# EAGLE board Board-v1.2 (EAGLE 9.7.0)
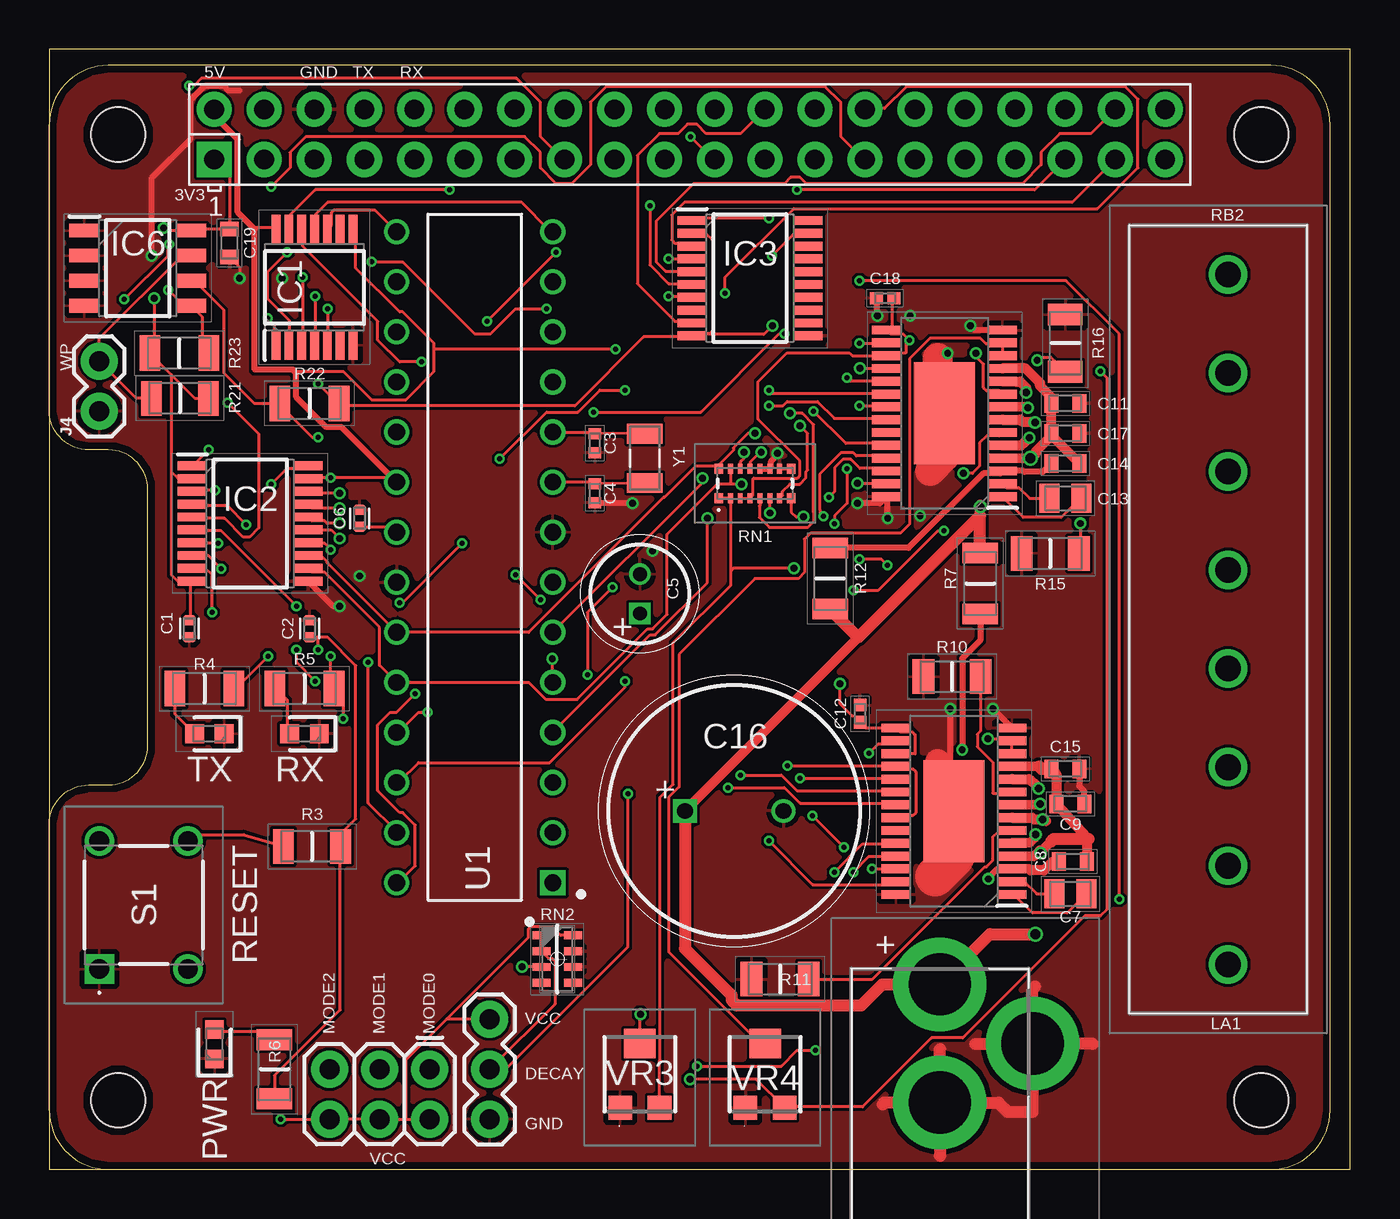
[diagram p0: board, top side]
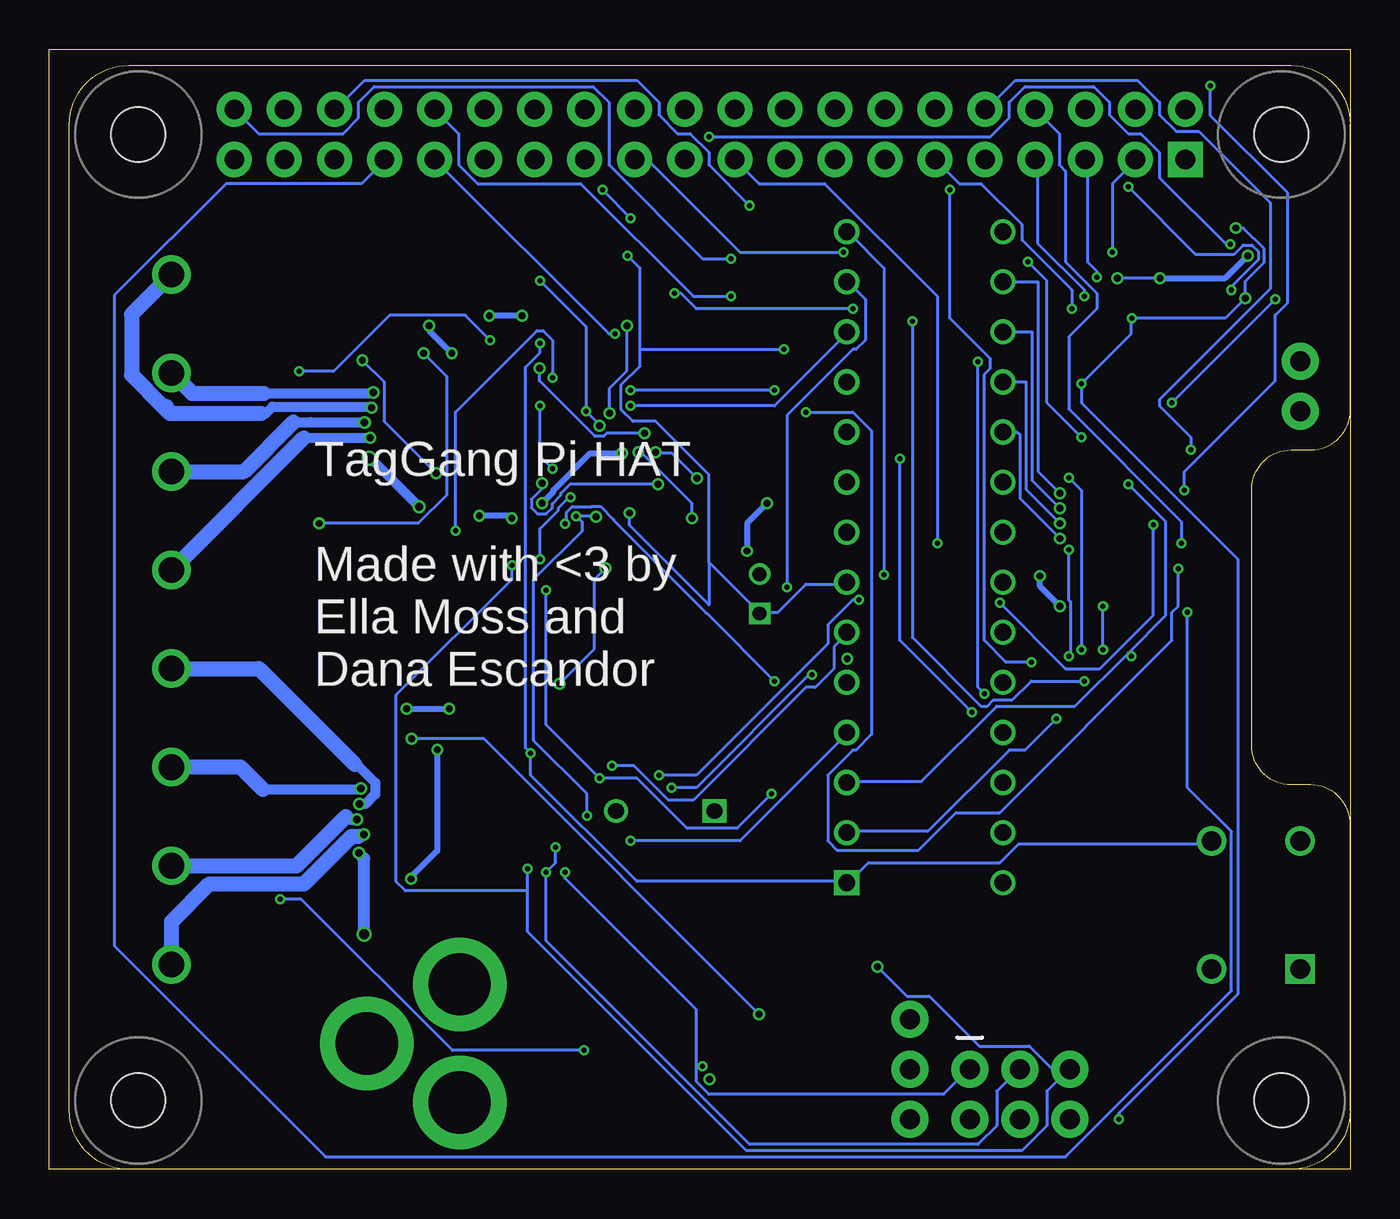
[diagram p1: board, bottom side, seen from below]

Size 66.02 x 56.82 mm. Coordinates in mm from the lower left corner, seen from the top.
Outline: 0,0 66.02,0 66.02,56.82 0,56.82 0,0
Copper layers (1*16): Top / Bottom
Stack-up Default Layer Stack: Top User Defined 0.035559375mm / Dielectric-1 User Defined 1.6mm / Bottom User Defined 0.035559375mm
Design rules "oshpark-2layer": minimum track width 6mil, minimum drill 10mil, track to track 6mil, track to pad 6mil, pad to pad 6mil, via to via 6mil, smd to smd 6mil, copper to edge 15mil, drill to drill 6mil, minimum pad ring 5mil, minimum via ring 5mil, stop-mask expansion 2.5mil, vias tented up to drill 0mil, thermal gap 10mil

## Footprints (pad centres in the part's own frame; a part is rotated, then mirrored left to right if it is on the bottom)
CAPC1005X55N = smd 0.54 x 0.6: 1 -0.43,0; 2 0.43,0
CAPC1005X55N' = smd 0.56 x 0.62: 1 -0.48,0; 2 0.48,0
CAPPRD200W52D500H1250 = drill 0.7 pad 1.1 square: 1 0,0 | drill 0.7 pad 1.1: 2 2,0
CAPC2012X94N = smd 1.02 x 1.47: 1 -0.81,0; 2 0.81,0
CAPC1608X90N = smd 0.73 x 0.94: 1 -0.71,0; 2 0.71,0
CAPC1005X55N'' = smd 0.65 x 0.62: 1 -0.44,0; 2 0.44,0
CAPPRD500W60D1275H2650 = drill 0.8 pad 1.2 square: 1 0,0 | drill 0.8 pad 1.2: 2 5,0
SOP65P640X120-14N = smd 1.475 x 0.45: 1 -2.938,1.95; 2 -2.938,1.3; 3 -2.938,0.65; 4 -2.938,0; 5 -2.938,-0.65; 6 -2.938,-1.3; 7 -2.938,-1.95; 8 2.938,-1.95; 9 2.938,-1.3; 10 2.938,-0.65; 11 2.938,0; 12 2.938,0.65; 13 2.938,1.3; 14 2.938,1.95
SOP65P640X120-20N = smd 1.475 x 0.45: 1 -2.938,2.925; 2 -2.938,2.275; 3 -2.938,1.625; 4 -2.938,0.975; 5 -2.938,0.325; 6 -2.938,-0.325; 7 -2.938,-0.975; 8 -2.938,-1.625; 9 -2.938,-2.275; 10 -2.938,-2.925; 11 2.938,-2.925; 12 2.938,-2.275; 13 2.938,-1.625; 14 2.938,-0.975; 15 2.938,-0.325; 16 2.938,0.325; 17 2.938,0.975; 18 2.938,1.625; 19 2.938,2.275; 20 2.938,2.925
SOP65P640X120-29N = smd 1.475 x 0.45: 1 -2.938,4.225; 2 -2.938,3.575; 3 -2.938,2.925; 4 -2.938,2.275; 5 -2.938,1.625; 6 -2.938,0.975; 7 -2.938,0.325; 8 -2.938,-0.325; 9 -2.938,-0.975; 10 -2.938,-1.625; 11 -2.938,-2.275; 12 -2.938,-2.925; 13 -2.938,-3.575; 14 -2.938,-4.225; 15 2.938,-4.225; 16 2.938,-3.575; 17 2.938,-2.925; 18 2.938,-2.275; 19 2.938,-1.625; 20 2.938,-0.975; 21 2.938,-0.325; 22 2.938,0.325; 23 2.938,0.975; 24 2.938,1.625; 25 2.938,2.275; 26 2.938,2.925; 27 2.938,3.575; 28 2.938,4.225 | smd 3.1 x 5.18: 29 0,0
SOIC127P600X175-8N = smd 1.525 x 0.7: 1 -2.712,1.905; 2 -2.712,0.635; 3 -2.712,-0.635; 4 -2.712,-1.905; 5 2.712,-1.905; 6 2.712,-0.635; 7 2.712,0.635; 8 2.712,1.905
1X03 = drill 1.016 pad 1.88: 1 0,0; 2 2.54,0; 3 5.08,0
PRT00119 = drill 3.162 pad 4.743: 1 -5.664,-1.286; 2 0.336,-1.286; 3 -2.664,3.414
TB00150008BE = drill 1.3 pad 1.95: 1 0,0; 2 5,0; 3 10,0; 4 15,0; 5 20,0; 6 25,0; 7 30,0; 8 35,0
1X02 = drill 1.016 pad 1.88: 1 0,0; 2 2.54,0
2X3 = drill 1.016 pad 1.88: 1 0,0; 2 0,2.54; 3 2.54,0; 4 2.54,2.54; 5 5.08,0; 6 5.08,2.54
LEDC1608X80N = smd 0.95 x 0.95: 1 -0.75,0; 2 0.75,0
RESC3116X65N = smd 1.05 x 1.75: 1 -1.45,0; 2 1.45,0
RESC3216X60N = smd 1.05 x 1.8: 1 -1.5,0; 2 1.5,0
RESC3216X70N = smd 1.05 x 1.8: 1 -1.55,0; 2 1.55,0
RESC3216X70N' = smd 1.1 x 1.75: 1 -1.45,0; 2 1.45,0
EXBU2H = smd 0.425 x 0.5: 1 -1.837,-0.75; 8 1.837,-0.75; 9 1.837,0.75; 16 -1.837,0.75 | smd 0.25 x 0.5: 2 -1.25,-0.75; 3 -0.75,-0.75; 4 -0.25,-0.75; 5 0.25,-0.75; 6 0.75,-0.75; 7 1.25,-0.75; 10 1.25,0.75; 11 0.75,0.75; 12 0.25,0.75; 13 -0.25,0.75; 14 -0.75,0.75; 15 -1.25,0.75
CAPCAV80P155X320X60-8L = smd 0.9 x 0.4: 1 -0.8,1.2; 2 0.8,1.2; 3 -0.8,0.4; 4 0.8,0.4; 5 -0.8,-0.4; 6 0.8,-0.4; 7 -0.8,-1.2; 8 0.8,-1.2
PTS645SH952LFS = drill 1 pad 1.5 square: 1 0,0 | drill 1 pad 1.5: 2 6.5,0; 3 0,-4.5; 4 6.5,-4.5
DIP794W46P254L2967H457Q28B = drill 0.85 square: 1 -3.96,16.51 | drill 0.85: 2 -3.96,13.97; 3 -3.96,11.43; 4 -3.96,8.89; 5 -3.96,6.35; 6 -3.96,3.81; 7 -3.96,1.27; 8 -3.96,-1.27; 9 -3.96,-3.81; 10 -3.96,-6.35; 11 -3.96,-8.89; 12 -3.96,-11.43; 13 -3.96,-13.97; 14 -3.96,-16.51; 15 3.96,-16.51; 16 3.96,-13.97; 17 3.96,-11.43; 18 3.96,-8.89; 19 3.96,-6.35; 20 3.96,-3.81; 21 3.96,-1.27; 22 3.96,1.27; 23 3.96,3.81; 24 3.96,6.35; 25 3.96,8.89; 26 3.96,11.43; 27 3.96,13.97; 28 3.96,16.51
TC33X2503E = smd 1.2 x 1.2: 1 -1,-1.7; 3 1,-1.7 | smd 1.6 x 1.5: 2 0,1.55
RASPI_BOARD_B+HAT_DF = drill 1 pad 1.778 square: 1 8.37,51.23 | drill 1 pad 1.778: 2 8.37,53.77; 3 10.91,51.23; 4 10.91,53.77; 5 13.45,51.23; 6 13.45,53.77; 7 15.99,51.23; 8 15.99,53.77; 9 18.53,51.23; 10 18.53,53.77; 11 21.07,51.23; 12 21.07,53.77; 13 23.61,51.23; 14 23.61,53.77; 15 26.15,51.23; 16 26.15,53.77; 17 28.69,51.23; 18 28.69,53.77; 19 31.23,51.23; 20 31.23,53.77; 21 33.77,51.23; 22 33.77,53.77; 23 36.31,51.23; 24 36.31,53.77; 25 38.85,51.23; 26 38.85,53.77; 27 41.39,51.23; 28 41.39,53.77; 29 43.93,51.23; 30 43.93,53.77; 31 46.47,51.23; 32 46.47,53.77; 33 49.01,51.23; 34 49.01,53.77; 35 51.55,51.23; 36 51.55,53.77; 37 54.09,51.23; 38 54.09,53.77; 39 56.63,51.23; 40 56.63,53.77 | hole 2.75: 3.5,3.5; 3.5,52.5; 61.5,3.5; 61.5,52.5
XTAL_CC7V-T1A-32.768KHZ-12.5PF-20PPM-TA-QC = smd 1 x 1.8: 1 -1.25,0; 2 1.25,0

## Placement (x,y rotation side)
C1  CC0402MRX5R6BB104  [CAPC1005X55N]  7.11,27.43 90 top
C2  CC0402MRX5R6BB104  [CAPC1005X55N]  13.21,27.43 270 top
C3  0402N150F500CT  [CAPC1005X55N']  27.69,36.83 90 top
C4  0402N150F500CT  [CAPC1005X55N']  27.69,34.29 90 top
C5  860020472001  [CAPPRD200W52D500H1250]  29.97,28.19 90 top
C6  CC0402MRX5R6BB104  [CAPC1005X55N]  15.75,33.02 90 top
C7  08055C103KAT4A  [CAPC2012X94N]  51.82,13.97 180 top
C8  CL10B104KA8NNNC  [CAPC1608X90N]  51.94,15.62 0 top
C9  CL10B104KA8NNNC  [CAPC1608X90N]  51.82,18.54 180 top
C11  CL10B104KA8NNNC  [CAPC1608X90N]  51.56,38.86 180 top
C12  C0402C474K9PACTU  [CAPC1005X55N'']  41.15,23.11 270 top
C13  08055C103KAT4A  [CAPC2012X94N]  51.56,34.04 180 top
C14  CL10B104KA8NNNC  [CAPC1608X90N]  51.56,35.81 0 top
C15  CL10B104KA8NNNC  [CAPC1608X90N]  51.56,20.32 180 top
C16  EGXF101ELL201MK25S  [CAPPRD500W60D1275H2650]  32.26,18.18 0 top
C17  CL10B104KA8NNNC  [CAPC1608X90N]  51.56,37.34 180 top
C18  C0402C474K9PACTU  [CAPC1005X55N'']  42.42,44.2 0 top
C19  CL10B104KA8NNNC  [CAPC1608X90N]  9.14,46.99 90 top
IC1  TXS0104EPWR  [SOP65P640X120-14N]  13.46,44.74 90 top
IC2  TXS0108EPWRG4  [SOP65P640X120-20N]  10.2,32.77 0 top
IC3  TXS0108EPWRG4  [SOP65P640X120-20N]  35.56,45.21 0 top
IC4  DRV8825PWPR  [SOP65P640X120-29N]  45.91,18.17 180 top
IC5  DRV8825PWPR  [SOP65P640X120-29N]  45.43,38.35 180 top
IC6  CAT24C32WI-GT3  [SOIC127P600X175-8N]  4.49,45.72 0 top
J1  [1X03]  22.35,2.54 90 top
J2  PRT-00119  [PRT00119]  46.48,3.72 270 top
J3  TB001-500-08BE  [TB00150008BE]  59.82,10.4 90 top
J4  [1X02]  2.54,38.46 90 top
J5  FEMALE 2x3  [2X3]  19.3,5.08 180 top
PWR  150060GS75000  [LEDC1608X80N]  8.38,6.35 90 top
R3  CRGCQ1206F1K0  [RESC3116X65N]  13.34,16.38 0 top
R4  CRCW1206360RJNEA  [RESC3216X60N]  7.87,24.38 0 top
R5  CRCW1206360RJNEA  [RESC3216X60N]  12.95,24.38 0 top
R6  CRCW1206360RJNEA  [RESC3216X60N]  11.43,5.08 90 top
R7  RK73B2BTTD105J  [RESC3216X70N]  47.24,29.72 90 top
R10  73L4R20J  [RESC3216X70N']  45.81,25 0 top
R11  73L4R20J  [RESC3216X70N']  37.08,9.65 0 top
R12  RK73B2BTTD105J  [RESC3216X70N]  39.62,29.97 270 top
R15  73L4R20J  [RESC3216X70N']  50.8,31.24 0 top
R16  73L4R20J  [RESC3216X70N']  51.56,41.91 270 top
R21  CRGCQ1206F1K0  [RESC3116X65N]  6.63,39.12 0 top
R22  CRCW12063K90FKEA  [RESC3216X60N]  13.21,38.86 0 top
R23  CRCW12063K90FKEA  [RESC3216X60N]  6.6,41.4 180 top
RN1  EXB-U2H103JV  [EXBU2H]  35.81,34.8 0 top
RN2  CAT16-103J4LF  [CAPCAV80P155X320X60-8L]  25.78,10.67 0 top
RX  150060RS75000  [LEDC1608X80N]  12.95,22.1 180 top
S1  PTS645SH952LFS  [PTS645SH952LFS]  2.54,10.16 90 top
TX  150060GS75000  [LEDC1608X80N]  8.13,22.1 180 top
U1  ATMEGA328P-PU  [DIP794W46P254L2967H457Q28B]  21.59,31.05 180 top
VR3  TC33X-2-103G  [TC33X2503E]  29.97,4.83 0 top
VR4  TC33X-2-103G  [TC33X2503E]  36.32,4.83 0 top
X1  RASPI_BOARD_B+_HD  [RASPI_BOARD_B+HAT_DF]  0,0 0 top
Y1  CC7V-T1A-32.768KHZ-12.5PF-20PPM-TA-QC  [XTAL_CC7V-T1A-32.768KHZ-12.5PF-20PPM-TA-QC]  30.23,36.07 270 top

## Library data of the parts
C1 C2 C6 = CC0402MRX5R6BB104; DESCRIPTION: 0.1 µF ±20% 10V Ceramic Capacitor X5R 0402 (1005 Metric); DIGIKEY_PART_NUMBER: 311-1731-2-ND; MF: Yageo; MP: CC0402MRX5R6BB104; PACKAGE: 0402 Yageo; PURCHASE-URL: https://pricing.snapeda.com/search?q=CC0402MRX5R6BB104&ref=eda
C3 C4 = 0402N150F500CT; DESCRIPTION: Multilayer Ceramic Capacitors MLCC - SMD/SMT 0402 MLCC NPO 15 pF +/- 1% 50 V T&R GP; HEIGHT: 0.55mm; MANUFACTURER_NAME: Walsin Technology Corporation; MANUFACTURER_PART_NUMBER: 0402N150F500CT
C5 = 860020472001; DESCRIPTION: Wurth Elektronik 4.7uF 25 V dc Aluminium Electrolytic Capacitor, WCAP-ATG5 Series 2000h 5 (Dia.) x 11mm; HEIGHT: 12.5mm; MANUFACTURER_NAME: Wurth Elektronik; MANUFACTURER_PART_NUMBER: 860020472001; MOUSER_PART_NUMBER: 710-860020472001; MOUSER_PRICE-STOCK: https://www.mouser.co.uk/ProductDetail/Wurth-Elektronik/860020472001?qs=0KOYDY2FL2%2F%252BlYkeK95R6A%3D%3D
C7 C13 = 08055C103KAT4A; DESCRIPTION: Multilayer Ceramic Capacitors MLCC - SMD/SMT 50V .01uF X7R 0805 10%TOL; HEIGHT: 0.94mm; MANUFACTURER_NAME: AVX; MANUFACTURER_PART_NUMBER: 08055C103KAT4A; MOUSER_PART_NUMBER: 581-08055C103KAT4A; MOUSER_PRICE-STOCK: https://www.mouser.com/Search/Refine.aspx?Keyword=581-08055C103KAT4A
C8 C9 C11 C14 C15 C17 C19 = CL10B104KA8NNNC; DESCRIPTION: Ceramic cap 0603 X7R 25V 100nF (Reel) Samsung Electro-Mechanics 100nF Multilayer Ceramic Capacitor (MLCC) 25 V +/-10% X7R dielectric CL max op. temp. +125C; HEIGHT: 0.9mm; MANUFACTURER_NAME: SAMSUNG; MANUFACTURER_PART_NUMBER: CL10B104KA8NNNC; MOUSER_PART_NUMBER: 187-CL10B104KA8NNNC; MOUSER_PRICE-STOCK: https://www.mouser.co.uk/ProductDetail/Samsung-Electro-Mechanics/CL10B104KA8NNNC?qs=349EhDEZ59rmu3pGeZXx0A%3D%3D
C12 C18 = C0402C474K9PACTU; DESCRIPTION: SMD Comm X5R, Ceramic, 0.47 uF, 10%, 6.3 VDC, 15.75 VDC, 85C, -55C, X5R, SMD, MLCC, Temperature Stable, Class II, 10 % , 1.0638 GOhms, 1.21 mg, 0402, 1mm, 0.5mm, 0.5mm, 0.3mm, 0.3mm, 10000, 78 Weeks, 70; HEIGHT: 0.55mm; MANUFACTURER_NAME: KEMET; MANUFACTURER_PART_NUMBER: C0402C474K9PACTU; MOUSER_PART_NUMBER: 80-C0402C474K9P; MOUSER_PRICE-STOCK: https://www.mouser.co.uk/ProductDetail/KEMET/C0402C474K9PACTU?qs=KHg1sw%2FVM5RivoKJ3oVJkQ%3D%3D
C16 = EGXF101ELL201MK25S; DESCRIPTION: Aluminum Electrolytic Capacitors - Radial Leaded 200uF 100 Volts 20%; HEIGHT: 26.5mm; MANUFACTURER_NAME: Chemi-Con; MANUFACTURER_PART_NUMBER: EGXF101ELL201MK25S; MOUSER_PART_NUMBER: 661-EGXF101ELL201MK2; MOUSER_PRICE-STOCK: https://www.mouser.co.uk/ProductDetail/United-Chemi-Con/EGXF101ELL201MK25S?qs=8BXZADTIn4FXlUL9JzZ4Ow%3D%3D
IC1 = TXS0104EPWR; DESCRIPTION: TXS0104EPWR, Voltage Level Translator, Open Drain 1.65 3.6 V, 2.3 5.5 V 14-Pin TSSOP; HEIGHT: 1.2mm; MANUFACTURER_NAME: Texas Instruments; MANUFACTURER_PART_NUMBER: TXS0104EPWR; MOUSER_PART_NUMBER: 595-TXS0104EPWR; MOUSER_PRICE-STOCK: https://www.mouser.co.uk/ProductDetail/Texas-Instruments/TXS0104EPWR?qs=7kv20MEVUlglsv2MH6ZndA%3D%3D
IC2 IC3 = TXS0108EPWRG4; DESCRIPTION: Translation - Voltage Levels 8B Bidir Vltg-Level Translator; HEIGHT: 1.2mm; MANUFACTURER_NAME: Texas Instruments; MANUFACTURER_PART_NUMBER: TXS0108EPWRG4; MOUSER_PART_NUMBER: 595-TXS0108EPWRG4; MOUSER_PRICE-STOCK: https://www.mouser.co.uk/ProductDetail/Texas-Instruments/TXS0108EPWRG4?qs=wkx8pu8tL7LKCwSiM1j4%252Bw%3D%3D
IC4 IC5 = DRV8825PWPR; DESCRIPTION: 2.5A Bipolar Stepper Motor Driver with On-Chip 1/32 Microstepping Indexer (Step/Dir Ctrl); HEIGHT: 1.2mm; MANUFACTURER_NAME: Texas Instruments; MANUFACTURER_PART_NUMBER: DRV8825PWPR; MOUSER_PART_NUMBER: 595-DRV8825PWPR; MOUSER_PRICE-STOCK: https://www.mouser.co.uk/ProductDetail/Texas-Instruments/DRV8825PWPR?qs=L4ss%2FyqpMWRQV%252B0JWK8r%2FQ%3D%3D
IC6 = CAT24C32WI-GT3; DESCRIPTION: EEPROM Serial-I2C 32K 4Kx8 1.8V/5V SOIC8 CAT24C32WI-GT3, EEPROM Memory 32kbit,, 4096 x, 8bit, Serial-I2C 1.7 5.5 V, 8-Pin SOIC; HEIGHT: 1.75mm; MANUFACTURER_NAME: onsemi; MANUFACTURER_PART_NUMBER: CAT24C32WI-GT3; MOUSER_PART_NUMBER: 698-CAT24C32WI-GT3; MOUSER_PRICE-STOCK: https://www.mouser.co.uk/ProductDetail/onsemi/CAT24C32WI-GT3?qs=rZgeL6XvLwaTa79VuYkKQA%3D%3D
J1 J4 = SparkFun-Connectors
J2 = PRT-00119; DESCRIPTION: SparkFun Accessories DC Barrel Power Jack/Connector; HEIGHT: 11mm; MANUFACTURER_NAME: SparkFun; MANUFACTURER_PART_NUMBER: PRT-00119; MOUSER_PART_NUMBER: 474-PRT-00119; MOUSER_PRICE-STOCK: https://www.mouser.co.uk/ProductDetail/SparkFun/PRT-00119?qs=WyAARYrbSnbnQpS9xf%252Bx5A%3D%3D
J3 = TB001-500-08BE; DESCRIPTION: Fixed Terminal Blocks Terminal block, screw type, 5.00 , horizontal, 8 poles, CUI Blue, slotted screw, PCB mount; HEIGHT: 12.9mm; MANUFACTURER_NAME: CUI Devices; MANUFACTURER_PART_NUMBER: TB001-500-08BE; MOUSER_PART_NUMBER: 490-TB001-500-08BE; MOUSER_PRICE-STOCK: https://www.mouser.co.uk/ProductDetail/CUI-Devices/TB001-500-08BE?qs=vLWxofP3U2yEuwKNSzgFJw%3D%3D
J5 = SparkFun-Connectors; PROD_ID: CONN-11566
PWR TX = 150060GS75000; DESCRIPTION: Wurth Elektronik WL-SMCW 520 nm Green LED, 1608 (0603) Clear SMD package; HEIGHT: 0.8mm; MANUFACTURER_NAME: Wurth Elektronik; MANUFACTURER_PART_NUMBER: 150060GS75000; MOUSER_PART_NUMBER: 710-150060GS75000; MOUSER_PRICE-STOCK: https://www.mouser.co.uk/ProductDetail/Wurth-Elektronik/150060GS75000?qs=LlUlMxKIyB0UYkq5lDO8nA%3D%3D
R3 R21 = CRGCQ1206F1K0; DESCRIPTION: SMD AEC-Q200 Compliant Thick Film Chip Resistor,; HEIGHT: 0.65mm; MANUFACTURER_NAME: TE Connectivity; MANUFACTURER_PART_NUMBER: CRGCQ1206F1K0; MOUSER_PART_NUMBER: 279-CRGCQ1206F1K0; MOUSER_PRICE-STOCK: https://www.mouser.co.uk/ProductDetail/TE-Connectivity-Holsworthy/CRGCQ1206F1K0?qs=wUXugUrL1qxm2LgdVtGvlQ%3D%3D
R4-R6 = CRCW1206360RJNEA; DESCRIPTION: Thick Film Resistors - SMD 1/4watt 360ohms 5%; HEIGHT: 0.6mm; MANUFACTURER_NAME: Vishay; MANUFACTURER_PART_NUMBER: CRCW1206360RJNEA; MOUSER_PART_NUMBER: 71-CRCW1206J-360-E3; MOUSER_PRICE-STOCK: https://www.mouser.co.uk/ProductDetail/Vishay-Dale/CRCW1206360RJNEA?qs=f6iYHOF0qgQa5fU%252BdQhP8Q%3D%3D
R7 R12 = RK73B2BTTD105J; DESCRIPTION: Thick Film Resistors - SMD 1/4watts 1Mohms 5%; HEIGHT: 0.7mm; MANUFACTURER_NAME: KOA Speer; MANUFACTURER_PART_NUMBER: RK73B2BTTD105J
R10 R11 R15 R16 = 73L4R20J; DESCRIPTION: Current Sense Resistors - SMD 0.2ohms 5%; HEIGHT: 0.7mm; MANUFACTURER_NAME: CTS; MANUFACTURER_PART_NUMBER: 73L4R20J; MOUSER_PART_NUMBER: 774-73L4R20J; MOUSER_PRICE-STOCK: https://www.mouser.co.uk/ProductDetail/CTS-Electronic-Components/73L4R20J?qs=hbgUSdfWRJU6l%2FyD8DKbaA%3D%3D
R22 R23 = CRCW12063K90FKEA; DESCRIPTION: CRCW1206 Resistor T/R 0.25W,1%,3K9 Vishay CRCW Series Thick Film Surface Mount Resistor 1206 Case 3.9k +/-1% 0.25W +/-100ppm/C; HEIGHT: 0.6mm; MANUFACTURER_NAME: Vishay; MANUFACTURER_PART_NUMBER: CRCW12063K90FKEA; MOUSER_PART_NUMBER: 71-CRCW1206-3.9K-E3; MOUSER_PRICE-STOCK: https://www.mouser.co.uk/ProductDetail/Vishay-Dale/CRCW12063K90FKEA?qs=cIcnZvs8mCNkQ0vWXL23Cw%3D%3D
RN1 = EXB-U2H103JV; DESCRIPTION: Series/Type: Anti-Sulfurated Chip Resistor Array, Power Rating (W): 0.063, Chip Size (LxW) (mm): 3.8 X 1.6, Resistance Values (): 10000, Resistance Tolerance (%): 5, Terminal Pitch (mm): 0.5, Type of Circuit: Isolated Circuit, Number of Elements (piece): 8, T.C.R (10/K): +/-200, Number of Terminals (piece): 16; HEIGHT: 0.55mm; MANUFACTURER_NAME: Panasonic; MANUFACTURER_PART_NUMBER: EXB-U2H103JV; MOUSER_PART_NUMBER: 667-EXB-U2H103JV; MOUSER_PRICE-STOCK: https://www.mouser.co.uk/ProductDetail/Panasonic/EXB-U2H103JV?qs=Z3CaLxJiOJJ7jC1v10U%2Fjw%3D%3D
RN2 = CAT16-103J4LF; DESCRIPTION: 4-array concave 1206 LF resistor,10K Bourns CAT16 Series 10k 5% Isolated SMT Resistor Array, 4 Resistors, 0.25W total 1206 Package; HEIGHT: 0.6mm; MANUFACTURER_NAME: Bourns; MANUFACTURER_PART_NUMBER: CAT16-103J4LF; MOUSER_PART_NUMBER: 652-CAT16-103J4LF; MOUSER_PRICE-STOCK: https://www.mouser.co.uk/ProductDetail/Bourns/CAT16-103J4LF?qs=yksRZAkH7gsi20GVw368rQ%3D%3D
RX = 150060RS75000; DESCRIPTION: WURTH ELEKTRONIK - 150060RS75000 - LED, 0603, RED, 250MCD, 625NM; HEIGHT: 0.8mm; MANUFACTURER_NAME: Wurth Elektronik; MANUFACTURER_PART_NUMBER: 150060RS75000; MOUSER_PART_NUMBER: 710-150060RS75000; MOUSER_PRICE-STOCK: https://www.mouser.co.uk/ProductDetail/Wurth-Elektronik/150060RS75000?qs=LlUlMxKIyB3QnmZ3fw%2FVCA%3D%3D
S1 = PTS645SH952LFS; DESCRIPTION: SWITCH TACTILE SPST-NO 0.05A 12V; HEIGHT: 4.4mm; MANUFACTURER_NAME: C & K COMPONENTS; MANUFACTURER_PART_NUMBER: PTS645SH952LFS; MOUSER_PART_NUMBER: 611-PTS645SH952; MOUSER_PRICE-STOCK: https://www.mouser.co.uk/ProductDetail/CK/PTS645SH952LFS?qs=FQH5YrIbzh%252B2bZJSGdqIFg%3D%3D
U1 = ATMEGA328P-PU; MANUFACTURER: Atmel
VR3 VR4 = TC33X-2-103G; DESCRIPTION: Trimmer Resistors - SMD 3MM 10KOHMS 25% 0.1WATT OPEN FRM; HEIGHT: 1.2mm; MANUFACTURER_NAME: Bourns; MANUFACTURER_PART_NUMBER: TC33X-2-103G; MOUSER_PART_NUMBER: 652-TC33X-2-103G; MOUSER_PRICE-STOCK: https://www.mouser.co.uk/ProductDetail/Bourns/TC33X-2-103G?qs=fmZCN1JtwVGHgHrSUcsPzA%3D%3D
X1 = raspberrypi_bastelstube_v13
Y1 = CC7V-T1A-32.768KHZ-12.5PF-20PPM-TA-QC; AVAILABILITY: In Stock; DESCRIPTION: LOW FREQUENCY CRYSTAL; MF: Micro Crystal; MP: CC7V-T1A-32.768kHz-12.5pF-20PPM-TA-QC; PACKAGE: SMD-2 Micro Crystal; PRICE: None; PURCHASE-URL: https://pricing.snapeda.com/search?q=CC7V-T1A-32.768kHz-12.5pF-20PPM-TA-QC&ref=eda

## Nets
3V3: C1.2 C19.2 IC1.1 IC2.2 IC2.10 IC3.2 IC3.10 IC6.8 J1.3 J5.2 J5.4 J5.6 R21.2 R22.2 R23.2 RN1.5 RN2.2 X1.1
5V: C2.2 C5.1 IC1.8 IC1.14 IC2.19 IC3.19 R3.2 R6.1 RN1.6 U1.7 U1.20 X1.2
24V: C8.2 C9.2 C11.2 C14.2 C15.2 C16.1 C17.2 IC4.4 IC4.11 IC5.4 IC5.11 J2.1 R7.2 R12.2
EEPROM_ID_SC: IC6.6 R22.1 X1.28
EEPROM_ID_SD: IC6.5 R23.1 X1.27
GND: C1.1 C2.1 C3.1 C4.1 C5.2 C6.2 C9.1 C11.1 C12.1 C15.1 C16.2 C17.1 C18.1 C19.1 IC1.7 IC2.11 IC3.11 IC4.14 IC4.28 IC4.29 IC5.14 IC5.28 IC5.29 IC6.1 IC6.2 IC6.3 IC6.4 J1.1 J2.2 J2.3 J4.1 PWR.1 R10.1 R11.1 R15.1 R16.1 RN1.9 RN1.10 RN1.11 RN1.12 RN2.4 RN2.6 RX.1 S1.1 TX.1 U1.8 U1.22 VR3.1 VR4.1 X1.6
GPIO2_SDA: IC1.2 X1.3
GPIO3_SCL: IC1.3 X1.5
GPIO4: IC1.4 X1.7
GPIO6: IC2.8 X1.31
GPIO7_CE1: X1.26
GPIO7_CEI: IC3.8
GPIO8_CE0: IC3.9 X1.24
GPIO9_SDI: IC2.5 X1.21
GPIO10_SDO: IC2.4 X1.19
GPIO11_SCK: IC2.6 X1.23
GPIO12_PWM0: IC3.7 X1.32
GPIO13_PWM1: IC2.9 X1.33
GPIO14_TX: IC2.7 X1.8
GPIO15_RX: IC2.1 X1.10
GPIO16: IC3.6 X1.36
GPIO17: IC1.5 X1.11
GPIO19: IC3.1 X1.35
GPIO20: IC3.5 X1.38
GPIO21: IC3.4 X1.40
GPIO22: IC2.3 X1.15
GPIO26: IC3.3 X1.37
JDECAY: IC4.19 IC5.19 J1.2 RN2.1 RN2.3
JM0: IC4.24 IC5.24 J5.1 RN1.7
JM1: IC4.25 IC5.25 J5.3 RN1.8
JM2: IC4.26 IC5.26 J5.5 RN2.5
L3V3: C12.2 IC4.15 IC4.17 RN1.1 RN1.2 VR3.3
LAOUT1: IC4.5 J3.1
LAOUT2: IC4.7 J3.2
LBOUT1: IC4.10 J3.3
LBOUT2: IC4.8 J3.4
LISENA: IC4.6 R11.2
LISENB: IC4.9 R10.2
LVREF: IC4.12 IC4.13 VR3.2
N$1: C13.1 IC5.1
N$2: R5.1 RX.2
N$3: PWR.2 R6.2
N$4: C6.1 U1.21
N$5: C7.1 IC4.1
N$6: C7.2 IC4.2
N$7: C13.2 IC5.2
N$8: C8.1 IC4.3 R7.1
N$9: C14.1 IC5.3 R12.1
N$10: R4.1 TX.2
N$11: IC6.7 J4.2 R21.1
N$12: IC3.12
N$13: IC3.13
N$14: IC3.14
N$15: IC3.15
N$16: IC3.16
N$17: IC3.17
N$18: IC3.18
N$19: IC3.20
PB0: IC1.11 IC4.20 U1.14
PB1: IC1.10 U1.15
PB2_CS#: IC2.18 U1.16
PB3_SDI: IC2.17 U1.17
PB4_SDO: IC2.16 U1.18
PB5_SCK: IC2.15 U1.19
PC0: IC2.13 IC5.18 RN1.16 U1.23
PC1: IC2.12 IC5.27 RN1.15 U1.24
PC2: IC5.20 U1.25
PC3: IC5.21 U1.26
PC4_SDA: IC1.13 U1.27
PC5_SCL: IC1.12 U1.28
PD0_RX: IC2.14 R5.2 U1.2
PD1_TX: IC2.20 R4.2 U1.3
PD2: IC4.27 RN1.13 U1.4
PD3: U1.5
PD4: IC4.18 IC4.22 RN1.14 U1.6
PD5: U1.11
PD6: IC5.22 U1.12
PD7: IC4.21 U1.13
R3V3: C18.2 IC5.15 IC5.17 RN1.3 RN1.4 VR4.3
RAOUT1: IC5.5 J3.5
RAOUT2: IC5.7 J3.6
RBOUT1: IC5.10 J3.7
RBOUT2: IC5.8 J3.8
RESET#: IC4.16 IC5.16 R3.1 S1.4 U1.1
RISENA: IC5.6 R16.2
RISENB: IC5.9 R15.2
RVREF: IC5.12 IC5.13 VR4.2
XTAL1: C4.2 U1.9 Y1.2
XTAL2: C3.2 U1.10 Y1.1

## Tracks (layer width: path | path; a pad name or v marks a point on that pad's centre or on a via)
3V3  (via drill 0.25, 0.35)
  Top 0.152: 6.19,40.32 R23.2 5.33,41.63 v5.33,44.2 | 6.19,40.32 7.39,39.12 R21.2 | X1.1 9.14,50.46 C19.2 7.28,47.7 IC6.8 5.94,47.62 v5.81,47.75 | 18.1,2.54 J5.4 J5.6 v11.75,2.54 | 18.1,2.54 J5.2 | J1.3 20.16,7.62 | 20.16,7.62 18.1,5.56 18.1,2.54 | C1.2 7.14,27.94 7.14,29.69 IC2.10 7.14,29.84 6.51,29.84 6.19,30.16 6.19,35.4 | 6.19,35.4 6.51,35.08 7.14,35.08 IC2.2 | 6.19,35.4 6.19,40.32 | IC1.1 11.43,41.91 11.43,42.82 v11.07,43.18 | 32.68,42.36 32.7,42.39 33.5,42.39 33.66,42.55 33.66,47.15 33.34,47.47 32.7,47.47 IC3.2 | 32.68,42.36 IC3.10 32.54,42.23 30.16,42.23 26.67,38.73 14.76,38.73 R22.2 14.61,38.89 v13.65,39.85 | v36.7,42.8 36.26,42.36 32.68,42.36 | RN2.2 25.95,11.87 25.53,12.3 24.44,12.3 24.3,12.16 24.3,11.76 20.16,7.62 | RN1.5 36.06,33.67 36.04,33.64 36.04,33.08 36.55,32.57 38.49,32.57 38.8,32.88 38.8,33.33 38.78,33.34 38.78,35.34 38.79,35.34 38.79,37.78 38.22,38.35 v37.59,38.35
  Bottom 0.152: v11.75,2.54 11.75,2.86 5.71,8.89 5.71,30.96 13.65,38.89 v13.65,39.85 11.11,42.39 11.11,43.18 v11.07,43.18 6.35,43.18 v5.33,44.2 5.33,45.05 4.37,46.01 4.37,46.7 5.42,47.75 v5.81,47.75 | v37.59,38.35 37.59,39.62 36.7,40.51 v36.7,42.8
5V  (via drill 0.25, 0.35)
  Top 0.152: 13.65,26.99 14.13,26.99 15.56,25.56 15.56,17.78 14.84,17.06 R3.2 14.76,16.38 14.76,8.1 11.43,4.76 R6.1 | 13.65,26.99 13.34,26.99 C2.2 | IC2.19 13.18,35.08 v14.29,35.08 17.3,35.08 U1.20 | IC1.14 11.43,47.78 10.48,47.78 10.43,47.68 | 19.53,41.59 19.53,40.48 18.1,39.05 16.35,39.05 14.92,40.48 12.54,40.48 12.54,40.4 | 19.53,41.59 19.53,41.91 17.94,43.5 17.78,43.5 15.56,45.72 15.56,47.62 IC1.8 | v36.67,46.35 37.78,47.47 38.42,47.47 IC3.19 | v28.73,41.59 19.53,41.59 | v13.65,26.35 13.65,26.99 | v36.57,33.3 RN1.6
  Top 0.305: X1.2 8.37,53.44 9.56,52.24 9.56,48.55 10.43,47.68 10.43,40.58 12.36,40.58 12.54,40.4 12.54,39.18 14.06,37.66 14.84,37.66 U1.20
  Bottom 0.152: 32.54,30.8 30,28.26 C5.1 29.84,28.26 29.05,28.26 27.62,29.69 25.56,29.69 U1.7 | 36.04,41.59 36.04,45.72 v36.67,46.35 | 32.54,30.8 32.54,28.64 36.57,32.66 v36.57,33.3 | 32.54,30.8 32.54,35.24 35.24,37.94 36.4,37.94 36.99,38.53 36.99,39.79 36.04,40.75 36.04,41.59 | 36.04,41.59 v28.73,41.59 | v13.65,26.35 13.65,34.45 v14.29,35.08
24V  (via drill 0.38, 0.41, 0.51)
  Top 0.152: IC5.4 48.42,36.2 48.42,36.07
  Top 0.483: v49.78,36.07 48.42,36.07 | IC4.4 49.95,15.89 | IC4.11 50.24,20.44
  Top 0.508: 52.65,16.86 C8.2 | 52.65,16.86 C9.2 51.11,20.07 C15.2 | 52.74,16.76 52.65,16.86 | C16.1 41.08,27 | C17.2 50.8,37.34 50.8,37.29 C14.2 | C17.2 C11.2 50.85,39.17 50.28,39.74 50.28,39.89 49.54,40.63 IC5.11 | v49.78,36.07 50.08,36.37 50.08,36.45 50.85,37.22 C17.2 | 47.23,33.15 47.23,33.74 47.27,33.7 47.27,33.63 v47.25,33.61 | 50.84,16.64 50.39,16.18 50.28,16.18 50.26,16.17 | 49.95,15.89 49.99,15.89 50.26,16.17 | 50.26,16.17 50.31,16.12 v50.31,16.04
  Top 0.61: v50.04,11.94 47.75,11.94 J2.1 42.27,9.39 41.21,8.32 34.9,8.32 34.63,8.59 34.63,8.83 32.26,11.19 C16.1 | R7.2 47.23,31.28 47.23,33.15 41.08,27 41.05,27 R12.2 | 50.84,16.64 50.97,16.76 52.74,16.76 | C15.2 50.36,20.32 50.24,20.44
  Bottom 0.508: v49.78,36.07 49.7,36.07 v47.25,33.61
  Bottom 0.61: v50.04,11.94 50.04,15.77 v50.31,16.04
EEPROM_ID_SC  (via drill 0.25)
  Top 0.152: IC6.6 7.37,45.09 8.86,43.6 8.86,40.41 10.4,38.86 R22.1 11.75,38.73 13.34,37.15 v13.65,37.15 | v34.29,44.45 34.29,45.24 37.78,48.74 53.18,48.74 55.24,50.8 55.24,54.29 54.61,54.93 43.5,54.93 42.39,53.82 41.43,53.82 X1.28 | v25.24,43.66 23.65,43.66 22.38,42.39 21.59,42.39 17.94,46.04 v16.35,46.04
  Bottom 0.152: v34.29,44.45 33.97,44.45 33.18,43.66 v25.24,43.66 | v16.35,46.04 15.4,45.09 15.4,38.89 v13.65,37.15
EEPROM_ID_SD  (via drill 0.25)
  Top 0.152: R23.1 7.77,41.73 7.77,43.25 IC6.5 6.83,43.81 v6.03,44.61 | v11.27,49.85 12.22,50.8 12.22,51.59 13.02,52.39 24.13,52.39 24.92,51.59 24.92,50.8 25.72,50.01 26.51,50.01 27.46,50.96 27.46,54.13 28.26,54.93 39.37,54.93 40.16,54.13 40.16,52.39 41.27,51.28 X1.27
  Bottom 0.152: v11.27,49.85 7.86,46.44 5.88,46.44 5.43,46.89 4.99,46.89 4.68,46.58 4.68,46.13 6.03,44.78 v6.03,44.61
GND  (via drill 0.35)
  Top 0.152: C19.1 9.65,45.77 v9.65,45.21 | RN1.10 RN1.9
  Top 0.305: RN1.12 RN1.11 36.63,35.62 36.63,35.92 36.96,36.25 v36.96,36.32 | v41.02,33.78 42.15,33.78 IC5.28 42.5,33.07 v42.55,33.02 | C4.1 29.56,33.81 v29.59,33.78 | C18.1 41.98,43.37 v42.04,43.31 | IC5.14 46.96,42.58 v46.74,42.8 | IC4.14 v47.88,23.36 v47.88,23.37 | IC4.29 45.72,18.36 v45.72,23.37 | v5.21,46.35 5.21,50.29 7.18,52.26 7.18,54.26 7.88,54.96 8.86,54.96 9.09,54.74 9.65,54.74 | IC2.11 14.4,28.57 v14.73,28.57 | C15.1 52.27,19.44 52.51,19.19 52.51,18.55 C9.1
  Top 0.61: J2.2 48.17,3.39 48.64,2.92 49.91,2.92 49.91,6.37 J2.3 | J2.3 52.92,6.39 52.96,6.35 | J2.3 49.9,9.13 50.04,9.27 | J2.3 49.86,6.35 46.99,6.35 | J2.2 42.38,3.39 42.29,3.3 | J2.2 45.2,0.7 45.21,0.69 | J2.2 45.2,6.08 45.21,6.1
  Top 1.27: IC4.29 45.09,18.99 45.09,20.7
  Top 1.524: 44.7,35.43 45.44,36.16 IC5.29 45.09,38.7 45.09,41.15
  Top 2.032: IC4.29 45.91,15.81 44.96,14.86
  Bottom 0.152: v9.65,45.21 v11.81,45.21
  Bottom 0.305: v29.59,33.78 30.61,32.77 v30.61,31.37 | v42.04,43.31 v43.69,43.31 | v47.88,23.37 v45.72,23.37 | v42.55,33.02 42.67,33.15 v44.2,33.15 | v46.74,42.8 46.74,42.55 v45.59,41.4 | v9.65,45.21 6.35,45.21 v5.21,46.35 | v14.73,28.57 15.75,29.59 v15.75,30.1 | v41.02,33.78 40.43,34.37 40.43,34.46 38.57,36.32 v36.96,36.32
  pour Top: -3.17,60.83 69.34,60.83 70.87,59.31 70.87,-0.38 68.45,-2.79 -4.32,-2.79 -6.35,-0.76 -6.35,57.66
GPIO2_SDA  (via drill 0.25)
  Top 0.152: v12.06,46.51 11.05,45.5 11.05,44.19 12.16,43.08 IC1.2
  Bottom 0.152: v12.06,46.51 12.06,50.01 10.95,51.12 X1.3
GPIO3_SCL  (via drill 0.25)
  Top 0.152: v12.86,45.24 12.86,41.91 IC1.3
  Bottom 0.152: v12.86,45.24 12.86,45.56 13.34,46.04 13.34,51.12 X1.5
GPIO4  (via drill 0.25)
  Top 0.152: v13.49,44.29 13.49,41.91 IC1.4
  Bottom 0.152: v13.49,44.29 13.49,44.61 15.88,46.99 15.88,51.12 X1.7
GPIO6  (via drill 0.25)
  Top 0.152: v8.73,30.48 8.1,31.11 7.3,31.11 IC2.8 | v37.31,42.39 37.04,42.39 33.07,38.42 v27.62,38.42
  Bottom 0.152: v8.73,30.48 8.73,28.57 9.05,28.26 9.05,26.83 17.78,18.1 20,18.1 21.91,16.19 26.04,16.19 26.51,16.67 26.51,20 25.24,21.27 25.08,21.27 24.29,22.07 24.29,37.47 25.24,38.42 v27.62,38.42 | v37.31,42.39 37.62,42.39 46.35,51.12 X1.31
GPIO8_CE0
  Top 0.152: IC3.9 32.54,43.02 31.75,43.02 29.84,44.93 29.84,51.44 30.96,52.55 31.91,52.55 32.38,53.02 32.86,53.02 33.34,52.55 35.08,52.55 36.2,53.66 X1.24
GPIO9_SDI  (via drill 0.25)
  Top 0.152: v9.05,38.89 10.64,37.31 10.64,32.54 10.16,32.07 9.84,32.07 8.89,33.02 7.3,33.02 IC2.5 | v3.81,44.13 6.03,46.35 6.03,46.87 v6.08,46.92 | v32.54,52.39 33.66,51.28 X1.21
  Bottom 0.152: v3.81,44.13 v9.05,38.89 | v32.54,52.39 18.26,52.39 17.3,53.34 17.3,54.13 16.51,54.93 13.02,54.93 12.22,54.13 12.22,53.5 11.27,52.55 10.64,52.55 9.68,51.59 9.68,50.31 6.29,46.92 v6.08,46.92
GPIO10_SDO  (via drill 0.25)
  Top 0.152: v10,32.7 9.05,33.66 7.3,33.66 IC2.4 | v17.78,28.73 17.94,28.73 v20.95,31.75
  Bottom 0.152: v10,32.7 10,28.1 12.7,25.4 14.45,25.4 v17.78,28.73 | v20.95,31.75 20.95,44.29 26.67,50.01 30,50.01 31.11,51.12 X1.19
GPIO11_SCK  (via drill 0.25)
  Top 0.152: v12.54,28.57 8.73,32.38 7.3,32.38 IC2.6 | v12.54,26.35 12.54,25.72 v13.49,24.77 | v25.72,46.51 v22.23,43.02
  Bottom 0.152: v12.54,26.35 v12.54,28.57 | v13.49,24.77 16.19,24.77 17.14,23.81 18.1,23.81 18.41,23.5 18.73,23.5 22.23,26.99 v22.23,43.02 | v25.72,46.51 30.96,46.51 35.56,51.12 36.2,51.12 X1.23
GPIO12_PWM0  (via drill 0.25)
  Top 0.152: v31.43,44.29 32.54,44.29 IC3.7
  Bottom 0.152: v31.43,44.29 33.34,44.29 39.05,50.01 44.29,50.01 45.24,50.96 45.24,52.55 46.35,53.66 X1.32
GPIO13_PWM1  (via drill 0.25)
  Top 0.152: v8.26,28.26 8.26,30.16 7.94,30.48 7.3,30.48 IC2.9
  Bottom 0.152: v8.26,28.26 8.26,19.37 6.03,17.14 6.03,9.05 14.45,0.64 52.01,0.64 62.71,11.34 62.71,44.34 57.04,50.01 50.16,50.01 49.05,51.12 X1.33
GPIO14_TX  (via drill 0.25)
  Top 0.152: v8.57,31.75 7.3,31.75 IC2.7
  Bottom 0.152: v8.57,31.75 8.57,32.86 14.29,38.58 14.29,42.23 12.86,43.66 12.86,44.45 14.45,46.04 14.45,50.64 14.76,50.96 14.76,52.55 15.88,53.66 X1.8
GPIO15_RX  (via drill 0.25)
  Top 0.152: v8.1,36.51 7.3,35.72 IC2.1
  Bottom 0.152: v8.1,36.51 8.1,37.15 9.68,38.73 9.68,39.05 4.07,44.67 4.07,49.03 7.69,52.65 8.84,52.65 9.68,53.5 9.68,54.13 10.79,55.24 16.99,55.24 18.41,53.82 X1.10
GPIO16  (via drill 0.25)
  Top 0.152: v30.48,48.9 30.48,45.88 31.43,44.93 32.54,44.93 IC3.6
  Bottom 0.152: v30.48,48.9 32.54,50.96 32.54,51.59 33.5,52.55 34.13,52.55 35.08,53.5 35.08,54.13 36.2,55.24 50.01,55.24 51.44,53.82 X1.36
GPIO17  (via drill 0.25)
  Top 0.152: v14.13,43.66 14.13,41.91 IC1.5
  Bottom 0.152: v14.13,43.66 14.13,44.61 16.67,47.15 16.67,47.94 18.73,50.01 19.84,50.01 20.95,51.12 X1.11
GPIO19  (via drill 0.25)
  Top 0.152: v36.51,48.26 32.7,48.26 IC3.1 | v37.94,49.69 50.01,49.69 51.44,51.12 X1.35
  Bottom 0.152: v37.94,49.69 v36.51,48.26
GPIO20
  Top 0.152: IC3.5 32.54,45.56 31.27,45.56 30.8,46.04 30.8,48.1 32.7,50.01 37.31,50.01 37.62,50.32 38.1,50.32 38.42,50.01 49.37,50.01 50.32,50.96 50.32,51.59 51.28,52.55 52.86,52.55 53.98,53.66 X1.38
GPIO21  (via drill 0.25)
  Top 0.152: v31.43,46.2 32.54,46.2 IC3.4
  Bottom 0.152: v31.43,46.2 32.86,46.2 37.62,50.96 37.62,54.13 38.42,54.93 49.53,54.93 50.32,54.13 50.32,53.34 51.12,52.55 55.4,52.55 56.52,53.66 X1.40
GPIO22  (via drill 0.25)
  Top 0.152: v8.41,34.45 7.3,34.45 IC2.3 | X1.15 26.04,51.28 24.92,52.39 24.92,54.13 23.71,55.34 7.72,55.34 7.35,54.98 v7.1,54.98
  Bottom 0.152: v8.41,34.45 8.41,35.4 3.81,40.01 3.81,43.34 3.17,43.97 3.17,49.53 7.1,53.45 v7.1,54.98
GPIO26
  Top 0.152: IC3.3 32.54,46.99 31.75,46.99 31.59,47.15 31.59,48.42 32.23,49.05 51.91,49.05 53.98,51.12 X1.37
JDECAY  (via drill 0.25)
  Top 0.152: v38.1,19.84 42.86,19.84 IC4.19 | v40.48,40.16 40.64,40.01 42.39,40.01 IC5.19 | v45.4,32.38 45.09,32.38 42.07,29.37 v40.8,29.37 | v29.37,19.05 29.37,11.28 23.17,5.08 J1.2 25.66,8.39 25.66,10.56 25.53,10.7 25.35,10.7 RN2.3 RN2.1
  Bottom 0.152: v29.37,19.05 31.11,17.3 33.66,17.3 36.2,19.84 v38.1,19.84 40.8,22.54 v40.8,29.37 | v40.48,40.16 40.48,42.07 40.96,42.55 41.27,42.55 45.4,38.42 v45.4,32.38
JM0  (via drill 0.25, 0.35)
  Top 0.152: v39.85,15.08 41.27,16.51 42.86,16.51 IC4.24 | v41.12,45.09 51.59,45.09 54.29,42.39 v54.29,13.7 | v38.89,6.03 37.94,6.03 37.15,5.24 v32.86,5.24 | IC5.24 42.39,36.83 40.42,36.83 v38.78,38.47 | RN1.7 37.21,34.19 37.21,34.39 37.58,34.77 38.08,34.77 38.4,35.08 38.4,35.38 38.48,35.47 38.48,37.34 v38.1,37.72
  Bottom 0.152: v39.85,15.08 39.85,14.76 33.18,8.1 33.18,5.24 | 33.18,5.24 33.18,4.45 32.54,3.81 20.64,3.81 19.37,5.08 J5.1 | v38.89,6.03 45.56,6.03 53.23,13.7 v54.29,13.7 | 33.18,5.24 v32.86,5.24 | v41.12,45.09 38.78,42.75 v38.78,38.47 38.1,37.78 v38.1,37.72
JM1  (via drill 0.25, 0.35)
  Top 0.152: v40.8,15.08 41.59,15.88 42.86,15.88 IC4.25 | v40.32,16.35 v38.73,17.94 | IC5.25 42.39,36.2 40.96,36.2 40.8,36.35 40.19,36.35 39.09,35.26 39.09,35.21 39.09,33.47 39.12,33.44 39.12,33.3 v39.29,33.13 | RN1.8 37.65,33.34 37.9,33.1 v38.27,33.1
  Bottom 0.152: J5.3 16.83,5.08 17.94,3.97 17.94,2.22 18.89,1.27 30.48,1.27 40.8,11.59 v40.8,15.08 40.32,15.56 v40.32,16.35 | v38.73,17.94 38.73,19.05 41.43,21.75 41.43,29.92 38.97,32.39 38.97,32.83 39.26,33.13 | v38.27,33.1 38.3,33.13 39.26,33.13 | 39.26,33.13 v39.28,33.13 v39.29,33.13
JM2  (via drill 0.25, 0.35)
  Top 0.152: v41.75,15.24 42.86,15.24 IC4.26 | v41.12,30.96 42.23,30.96 v42.55,30.64 | IC5.26 42.39,35.56 41.14,35.56 40.68,36.02 40.28,36.02 39.85,35.58 39.85,34.38 v39.57,34.1 | RN2.5 24.02,10.27 v24,10.29
  Bottom 0.152: 41.75,14.13 41.75,12.06 30.64,0.95 16.67,0.95 15.4,2.22 15.4,3.97 14.29,5.08 | 41.75,14.13 v41.75,15.24 | 14.29,5.08 J5.5 | v42.55,30.64 42.55,29.94 48.41,24.08 48.41,14.6 47.94,14.13 41.75,14.13 | v41.12,30.96 41.12,32.51 40.19,33.44 40.19,33.55 39.73,34.01 39.66,34.01 v39.57,34.1 | v24,10.29 22.5,8.79 21.36,8.79 18.82,6.25 16.28,6.25 15.11,5.08 14.29,5.08
L3V3  (via drill 0.35)
  Top 0.152: v40.13,24.64 40.13,23.61 40.74,23 40.82,23 C12.2 41.43,22.39 IC4.15 43.17,22.2 43.81,22.2 43.94,22.06 43.94,21.08 42.98,21.08 IC4.17 | VR3.3 30.97,5.5 31,5.53 31,18.88 31.66,19.53 31.66,26.7 34.58,29.63 34.58,30.35 | RN1.1 RN1.2 34.58,34.03 34.58,30.35 | v37.79,30.5 34.73,30.5 34.58,30.35
  Bottom 0.152: v40.13,24.64 38.35,26.42 38.35,29.94 v37.79,30.5
LAOUT1  (via drill 0.38)
  Top 0.483: IC4.5 48.88,16.57 49.75,16.57 49.98,16.8 49.98,17 50.04,17 v50.06,16.98
  Bottom 0.483: 50.35,16.89 50.26,16.98 v50.06,16.98
  Bottom 0.762: J3.1 59.82,12.56 57.89,14.49 53.09,14.49 50.68,16.89 50.35,16.89
LAOUT2  (via drill 0.38)
  Top 0.508: 50.57,17.67 50.59,17.67 | IC4.7 49.88,17.84 49.97,17.75 50.48,17.75 50.57,17.67 | 50.57,17.67 50.48,17.67 v50.41,17.74
  Bottom 0.508: 50.97,17.9 50.92,17.9 50.77,17.74 v50.41,17.74
  Bottom 0.762: J3.2 53.47,15.4 50.97,17.9
LBOUT1  (via drill 0.38)
  Top 0.508: IC4.10 49.74,19.79 50.08,19.45 50.08,19.43 50.19,19.32 v50.21,19.32
  Bottom 0.508: v50.21,19.32 50.26,19.26 55.17,19.26
  Bottom 0.762: 55.17,19.26 56.31,20.4 J3.3
LBOUT2  (via drill 0.38)
  Top 0.483: IC4.8 50.24,18.49
  Top 0.508: 50.24,18.49 50.27,18.49 | 50.27,18.49 | 50.27,18.49 v50.27,18.53
  Bottom 0.508: v50.27,18.53 49.97,18.53 49.48,19.02 49.48,19.62 50.41,20.55 50.52,20.55
  Bottom 0.762: J3.4 55.37,25.4 50.52,20.55
LISENA
  Top 0.152: IC4.6 48.79,17.13 48.16,17.13 47.88,16.86 47.88,15.68 47.56,15.35 47.48,15.35 41.78,9.65 R11.2
LISENB
  Top 0.152: IC4.9 48.79,19.08 47.88,19.08 47.88,20.66 47.09,21.45 47.09,22.06 47.26,22.23 R10.2
LVREF  (via drill 0.35)
  Top 0.152: IC4.12 IC4.13 48.75,21.84 v47.62,21.84 | VR3.2 29.97,7.85 v30,7.87
  Bottom 0.152: v30,7.87 43.97,21.84 v47.62,21.84
N$1
  Top 0.152: C13.1 52.32,34.04 51.36,33.07 49.43,33.07 IC5.1
N$2
  Top 0.152: RX.2 12.06,22.23 12.06,23.81 11.59,24.29 R5.1
N$3
  Top 0.152: PWR.2 8.41,6.99 11.11,6.99 11.43,6.67 R6.2
N$4
  Top 0.152: C6.1 17.36,32.59 U1.21
N$5
  Top 0.152: C7.1 51.66,13.01 49.89,13.01 48.96,13.94 IC4.1
N$6
  Top 0.152: IC4.2 48.91,14.65 49.43,14.65 50.11,13.97 C7.2
N$7
  Top 0.152: IC5.2 48.57,34.58 49.2,34.58 49.75,34.04 C13.2
N$8  (via drill 0.35)
  Top 0.305: R7.1 47.24,26.83 46.33,25.92 v46.33,21.28 | v47.66,14.73 47.81,14.88 47.81,14.94 48.11,15.24 IC4.3
  Top 0.483: IC4.3 49.74,15.24 49.76,15.22
  Top 0.508: 49.76,15.22 49.81,15.17 50.49,15.17 50.94,15.62 C8.1
  Bottom 0.305: v47.66,14.73 47.75,14.73 46.33,16.16 v46.33,21.28
N$9
  Top 0.305: R12.1 43.6,31.52 47.39,35.31 48.25,35.31 IC5.3 49.45,35.43 49.5,35.38 50.42,35.38 C14.1
N$10
  Top 0.152: R4.1 6.37,23.1 TX.2
N$11
  Top 0.152: R21.1 4.42,39.12 J4.2 2.54,42.15 6.74,46.35 IC6.7
PB0  (via drill 0.25)
  Top 0.152: IC1.11 13.49,47.78 13.49,48.42 14.13,49.05 23.97,49.05 25.4,47.62 U1.14 | v35.08,20 37.15,20 37.94,19.21 42.86,19.21 IC4.20 | v23.65,30.16 v24.92,28.89
  Bottom 0.152: v35.08,20 33.18,20 26.51,26.67 26.51,27.62 25.24,28.89 v24.92,28.89 | v23.65,30.16 23.65,45.72 25.4,47.47 U1.14
PB1
  Top 0.152: IC1.10 14.31,47.88 14.31,48.51 14.44,48.65 16.55,48.65 U1.15
PB2_CS#  (via drill 0.35)
  Top 0.152: v14.73,34.29 13.24,34.29 IC2.18
  Bottom 0.152: v14.73,34.29 15.85,35.41 15.85,45.02 U1.16
PB3_SDI  (via drill 0.35)
  Top 0.152: v14.73,33.53 13.99,33.53 13.97,33.55 13.33,33.55 IC2.17
  Bottom 0.152: v14.73,33.53 16.15,34.95 16.15,42.48 U1.17
PB4_SDO  (via drill 0.35)
  Top 0.152: v14.73,32.77 14.1,32.77 13.97,32.9 13.33,32.9 IC2.16
  Bottom 0.152: v14.73,32.77 16.46,34.49 16.46,39.94 U1.18
PB5_SCK  (via drill 0.35)
  Top 0.152: IC2.15 14.29,32.44 v14.73,32
  Bottom 0.152: v14.73,32 16.76,34.04 16.76,37.25 16.91,37.4 U1.19
PC0  (via drill 0.35)
  Top 0.152: IC2.13 13.77,31.14 14.1,30.81 14.1,30.77 U1.23 24.32,27.24 31.17,34.09 31.22,34.09 32.81,35.67 33.92,35.67 | v41.15,40.64 42.49,40.64 IC5.18 | RN1.16 33.92,35.6 33.92,35.67 | 33.92,35.67 34.72,36.47 34.72,36.6 35.46,37.34 v35.81,37.34
  Bottom 0.152: v41.15,40.64 41.15,40.01 38.33,37.19 37.88,37.19 37.73,37.34 v35.81,37.34
PC1  (via drill 0.35)
  Top 0.152: IC2.12 13.33,30.3 13.97,30.3 16.76,27.5 16.76,25.57 U1.24 24.32,24.7 25.19,23.84 26.79,23.84 30.37,27.41 30.62,27.41 31.35,28.15 31.35,32.21 33.92,34.78 34.54,34.78 | v41.02,34.8 42.48,34.8 IC5.27 | RN1.15 34.56,34.8 34.54,34.78 | v35.12,34.75 35.1,34.78 34.54,34.78
  Bottom 0.152: v35.12,34.75 35.14,34.77 39.58,34.77 40.05,34.3 40.05,34.21 40.49,33.77 40.49,33.56 40.8,33.25 41.24,33.25 41.55,33.56 41.55,34 41.02,34.53 v41.02,34.8
PC2  (via drill 0.25)
  Top 0.152: v36.51,39.53 36.67,39.37 42.39,39.37 IC5.20 | v29.21,39.53 27.94,39.53 26.83,38.42 25.24,38.42 v22.86,36.04 | v19.21,23.18 18.73,23.18 17.78,22.23 U1.25
  Bottom 0.152: v29.21,39.53 v36.51,39.53 | v22.86,36.04 22.86,26.83 v19.21,23.18
PC3  (via drill 0.25)
  Top 0.152: v41.12,38.73 42.39,38.73 IC5.21 | v29.21,24.77 29.21,24.45 25.4,20.64 18.73,20.64 17.78,19.68 U1.26 | v40.48,35.53 40.48,33.79 39.85,33.16 v39.85,32.76
  Bottom 0.152: v40.48,35.53 41.12,36.17 v41.12,38.73 | v39.85,32.76 39.78,32.83 39.78,33.33 39.49,33.62 38.51,33.62 38.5,33.63 38.05,33.63 37.38,32.96 37.38,32.92 32.67,28.21 32.65,28.21 v29.21,24.77
PC4_SDA  (via drill 0.25)
  Top 0.152: v20.32,49.69 13.49,49.69 12.22,48.42 12.22,47.78 IC1.13 | v16.19,25.72 16.19,18.57 17.62,17.14 U1.27
  Bottom 0.152: v20.32,49.69 20.32,43.18 18.26,41.12 18.26,40.64 18.57,40.32 18.57,26.83 17.46,25.72 v16.19,25.72
PC5_SCL  (via drill 0.25)
  Top 0.152: v18.89,40.96 17.78,40.96 16.67,42.07 16.67,43.02 12.86,46.83 12.86,47.62 IC1.12 | v18.57,24.13 17.62,23.18 17.3,23.18 16.67,22.54 16.67,19.21 17.78,18.1 17.94,18.1 18.57,17.46 18.57,15.4 17.78,14.61 U1.28
  Bottom 0.152: v18.89,40.96 18.89,24.45 v18.57,24.13
PD0_RX  (via drill 0.25)
  Top 0.152: v14.29,31.43 13.97,31.75 13.18,31.75 IC2.14 | v14.29,26.04 14.29,24.61 14.45,24.45 R5.2 14.61,24.29 14.92,23.97 v14.92,22.86
  Bottom 0.152: v14.92,22.86 16.51,21.27 17.3,21.27 21.43,17.14 25.4,17.14 U1.2 | v14.29,26.04 14.2,26.12 14.2,28.8 14.29,28.88 v14.29,31.43
PD1_TX  (via drill 0.25)
  Top 0.152: v11.27,34.77 12.06,35.56 13.02,35.56 IC2.20 | v11.11,26.04 9.53,24.45 R4.2
  Bottom 0.152: v11.27,34.77 9.37,32.86 9.37,28.1 11.27,26.19 | 11.27,26.19 13.97,23.5 17.94,23.5 21.75,19.68 25.4,19.68 U1.3 | 11.27,26.19 v11.11,26.04
PD2  (via drill 0.25, 0.35)
  Top 0.152: U1.4 30.5,27.11 30.74,27.11 33.4,29.77 v33.4,33.02 | RN1.13 35.58,35.57 35.58,35.89 36.08,36.39 v36.13,36.39 | v36.51,16.67 38.73,14.45 42.86,14.45 IC4.27
  Bottom 0.152: v33.4,33.02 33.4,33.78 36.07,36.45 v36.13,36.39 | v36.51,16.67 30.96,16.67 25.56,22.07 U1.4
PD3  (via drill 0.35)
  Top 0.152: U1.5 25.55,25.89 v25.53,25.91
PD4  (via drill 0.25, 0.35)
  Top 0.152: U1.6 33.15,34.84 v33.15,35.05 | RN1.14 35.08,35.57 35.08,35.89 35.25,36.06 v35.25,36.38 | IC4.22 43.02,17.94 43.81,17.94 43.97,18.1 43.97,20.16 43.81,20.32 43.02,20.32 IC4.18 42.86,20.48 v37.47,20.48
  Bottom 0.152: v33.15,35.05 34.42,36.32 35.19,36.32 v35.25,36.38 | v37.47,20.48 36.35,20.48 34.61,18.73 33.34,18.73 27.62,24.45 27.15,24.45 26.19,25.4 26.19,26.51 25.56,27.15 U1.6
PD6  (via drill 0.25)
  Top 0.152: IC5.22 42.39,38.1 39.83,38.1 38.98,38.95 37.44,38.95 37.22,38.73 v36.51,38.73
  Bottom 0.152: v36.51,38.73 29.21,38.73 25.56,42.39 U1.12
PD7  (via drill 0.25)
  Top 0.152: v34.45,19.37 37.31,19.37 38.1,18.57 42.86,18.57 IC4.21 | v27.3,25.08 27.3,28.26 v28.57,29.53
  Bottom 0.152: v34.45,19.37 33.18,19.37 27.46,25.08 v27.3,25.08 | v28.57,29.53 28.57,38.26 25.24,41.59 25.08,41.59 24.61,42.07 24.61,44.13 25.4,44.93 U1.13
R3V3  (via drill 0.25, 0.35)
  Top 0.152: C18.2 42.79,44.12 42.79,42.61 42.75,42.58 IC5.15 42.69,42.38 43.33,42.38 43.46,42.25 43.46,42.07 | 43.46,42.07 43.46,41.4 42.62,41.4 IC5.17 40.75,41.28 40.61,41.42 37.44,41.42 35.97,39.96 35.97,38.06 38.09,35.94 38.09,35.2 37.96,35.07 35.75,35.07 35.71,35.03 35.71,34.19 RN1.4 RN1.3 | v32.51,4.57 35.88,4.57 VR4.3 37.47,3.17 41.27,3.17 44.77,6.67 46.35,6.67 52.55,12.86 53.34,12.86 53.66,13.18 53.66,40.16 v53.34,40.48 | 43.46,42.07 v43.66,42.07
  Bottom 0.152: v53.34,40.48 51.59,40.48 48.74,43.33 44.92,43.33 v43.66,42.07
RAOUT1  (via drill 0.36)
  Top 0.508: IC5.5 49.33,36.73 49.46,36.85 49.48,36.85 v49.74,37.12
  Bottom 0.508: 53.1,37.11 v49.74,37.11 v49.74,37.12
  Bottom 0.762: J3.5 53.1,37.11
RAOUT2  (via drill 0.38)
  Top 0.508: IC5.7 49.27,38.03 49.36,37.93 49.98,37.93 v50.02,37.89
  Bottom 0.508: v50.02,37.89 52.77,37.89 52.78,37.9 53.63,37.9
  Bottom 0.762: J3.6 56.13,35.4 53.63,37.9
RBOUT1  (via drill 0.38)
  Top 0.483: 49.02,39.96 48.39,39.96 IC5.10
  Top 0.508: 49.02,39.96 49.28,39.96 49.56,39.67 49.56,39.62 49.58,39.6 v49.58,39.42
  Bottom 0.508: v49.58,39.42 49.64,39.36 55.13,39.36
  Bottom 0.762: J3.7 58.77,39.36 55.13,39.36 55.12,39.37
RBOUT2  (via drill 0.36)
  Top 0.483: IC5.8 49.6,38.68
  Top 0.508: 49.6,38.68 49.62,38.68 v49.66,38.64
  Bottom 0.508: 60.06,38.69 59.94,38.57 | v49.66,38.64 49.7,38.69 54.69,38.69 55.02,38.35 55.24,38.35
  Bottom 0.762: J3.8 61.85,43.37 61.85,40.3 60.24,38.69 | 60.06,38.69 60.24,38.69 | 60.24,38.69 59.9,38.35 55.24,38.35
RESET#  (via drill 0.25)
  Top 0.152: R3.1 9.88,16.99 7.46,16.99 7.14,16.67 S1.4 | v41.59,21.11 42.07,21.59 42.86,21.59 IC4.16 | v41.12,41.91 42.39,41.91 IC5.16
  Bottom 0.152: v41.12,41.91 41.12,41.43 41.86,40.69 41.86,21.38 v41.59,21.11 41.59,20 36.2,14.61 25.56,14.61 U1.1 25.4,14.61 24.45,15.56 17.78,15.56 16.83,16.51 7.14,16.51 S1.4
RISENA  (via drill 0.35)
  Top 0.152: R16.2 50.82,41.2 50.29,41.2 v50.13,41.04 | v46.39,35.31 46.85,35.31 47.21,35.67 47.21,36.85 47.57,37.21 48.21,37.21 IC5.6
  Bottom 0.152: v50.13,41.04 49.03,39.94 49.03,37.95 v46.39,35.31
RISENB  (via drill 0.35)
  Top 0.152: v52.32,32.77 52.32,31.32 R15.2 | v47.02,41.4 47.02,41.23 47.41,40.84 47.41,39.66 47.58,39.49 48.21,39.49 IC5.9
  Bottom 0.152: v47.02,41.4 45.86,40.23 45.86,34.21 47.3,32.77 v52.32,32.77
RVREF
  Top 0.152: IC5.12 IC5.13 48.31,41.87 47.54,41.87 47.25,42.16 44.7,42.16 43.66,41.12 43.66,32.73 43.2,32.28 38.63,32.28 38.32,31.97 38.32,30.28 38.01,29.97 35.81,29.97 31.96,26.12 31.96,19.41 31.43,18.88 31.43,11.03 36.08,6.38 VR4.2
XTAL1
  Top 0.152: Y1.2 30.21,34.8 C4.2 27.68,34.86 U1.9
XTAL2
  Top 0.152: U1.10 27.68,37.4 C3.2 30.21,37.34 Y1.1

## Text on the board
tNames: 5V | GND | TX | RX | 3V3 | RB2 | WP | + | + | + | RESET | MODE2 | MODE1 | MODE0 | VCC | LA1 | DECAY | GND | VCC
bNames: TagGang Pi HAT / / Made with <3 by / Ella Moss and / Dana Escandor